# Altium PCB RheoBoard_V8.PcbDoc (part 2 of 3)
Units mm, origin at the board's own origin, x right, y up, seen from the top; angles counter-clockwise.
Board outline 57.53 x 83.82 mm, 2 copper layers (Top Layer, Bottom Layer); 104 components, 45 nets, 269 pads, 428 vias.
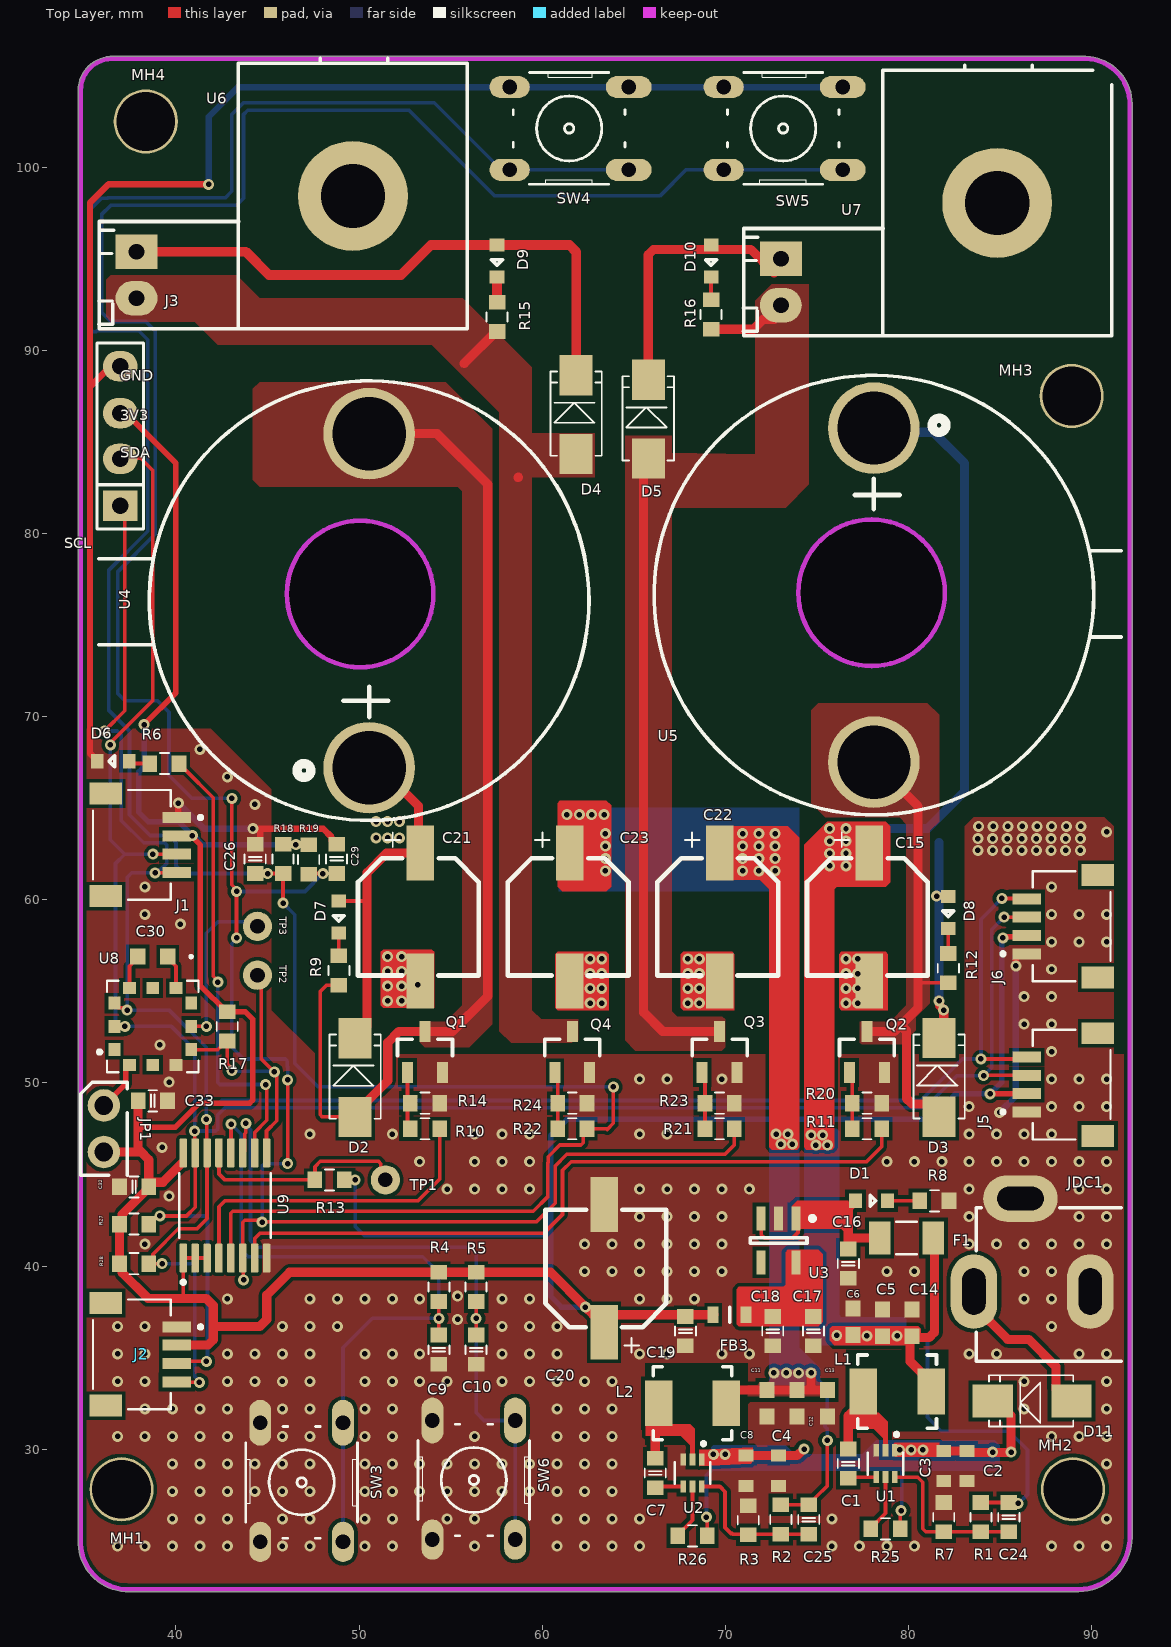
[diagram p0: Top Layer view]

## Via types
v1: diameter 0.6, hole 0.3, Top Layer to Bottom Layer, tented both sides, 428 vias

## Nets (pads, with @x,y where several pads share a name; then routed paths per layer and width w, separated by ;. In a path a pad name is that pad's centre, name@x,y a point inside that pad or via, vN(x,y) a via of type N, cw(c..) or ccw(c..) an arc to the next point about the centre after c; other vN are vias at no path point) (continued)
4V5: (continued)
  Bottom Layer w0.2: v1@77.844,36.195 80.909,36.195 81.026,36.078 81.026,31.75 81.788,30.988 85.471,30.988 86.487,29.972 86.487,27.533 86.005,27.051 v1(85.979,27.051) ; v1(81.534,60.198) 81.661,60.325 81.62,60.325 81.562,60.383 81.562,60.798 81.661,60.896
  Bottom Layer w0.5: v1@75.311,46.863 75.311,36.576 75.692,36.195 v1@77.844,36.195 ; v1(76.581,63.881) 81.026,63.881 83.058,65.913 83.058,83.82 81.355,85.523 78.334,85.523 U5.1@78.105,85.752 ; v1(81.661,54.483) 81.661,60.325 81.661,60.896 81.661,63.119
  other v1: 77.724,36.195 79.375,36.195 76.076,36.222 74.93,46.609 75.565,46.609 74.676,47.152 75.311,47.152 81.915,53.975 75.692,61.849 76.581,61.849 75.692,62.526 76.581,62.526 75.692,63.204 76.581,63.204 50.927,63.373 51.562,63.373 52.197,63.373 75.692,63.881 50.927,64.262 51.562,64.262 52.197,64.262
4V5A: C16.2 D1.1 F1.2 U3.1 U3.3 | length 8.6
  Top Layer w0.2: U3.3@71.948,42.602 71.948,41.717 72.136,41.529 73.66,41.529 73.96,41.829 73.96,42.414 73.998,42.452 U3.1@73.848,42.602
  Top Layer w0.5: C16.2@76.708,40.848 C16.2@76.858,40.998 ; C16.2@76.708,41.021 76.708,41.529 ; D1.1@77.103,43.561 76.708,43.166 76.708,41.529 ; F1.2@78.413,41.529 76.708,41.529
6V: C11.2 C12.2 C13.2 C22.1 C23.1 C25.2 D4.2 D5.2 D9.1 D10.1 L2.2 R2.2 U6.1 U7.1 | length 96.1
  Top Layer w0.2: R2.2@73.025,26.962 C25.2@74.333,26.962 ; C25.2@74.549,26.962 74.599,26.962 74.899,27.262 74.899,27.348 75.565,28.014 v1(75.565,30.48)
  Top Layer w0.5: D5.2@65.786,88.381 65.786,95.211 66.079,95.504 71.374,95.504 U7.1@72.644,94.234 ; C22.1@69.681,62.545 69.681,62.095 70.181,61.595 72.715,61.595 73.109,61.2 73.348,61.2 73.498,61.05 73.498,54.143 73.406,54.051 v1(73.406,47.198) v1@73.406,47.117 ; L2.2@70.049,32.512 L2.2@70.049,32.736 ; L2.2@70.549,33.312 70.049,32.812 L2.2@70.049,32.736 ; 74.676,33.312 v1(74.676,34.163) ; C13.2@75.565,33.236 C12.2@73.914,33.236 C11.2@72.263,33.236 70.549,33.236 L2.2@70.049,32.736
  Top Layer w0.53: U6.1@37.338,95.377 U6.1@37.846,95.377 43.815,95.377 45.085,94.107 52.289,94.107 53.926,95.744 D9.1@57.531,95.744 61.482,95.744 61.849,95.377 D4.2@61.849,88.635
  Bottom Layer w0.2: v1(74.676,34.163) 75.565,33.274 75.565,31.868 75.438,31.741 75.438,31.228 75.565,31.101 v1(75.565,30.48)
  Bottom Layer w0.5: v1@73.406,47.117 73.406,47.09 73.533,46.963 73.533,35.306 v1(74.676,34.163)
  other v1: 72.647,34.163 73.323,34.163 74,34.163 73.025,46.655 73.66,46.655 72.771,47.198 63.439,61.573 70.932,61.573 71.821,61.573 72.71,61.573 63.439,62.25 70.932,62.25 71.821,62.25 72.71,62.25 63.439,62.928 70.932,62.928 71.821,62.928 72.71,62.928 63.439,63.605 70.932,63.605 71.821,63.605 72.71,63.605 61.341,64.643 62.018,64.643 62.696,64.643 63.373,64.643
+12: D11.1 JDC1.1 | length 9
  Top Layer w0.5: JDC1.1@83.566,38.608 83.566,37.846 85.412,36 86.555,36 88.039,34.516 88.039,33.289 88.689,32.639 D11.1@88.889,32.639
D3V3: C19.2 C20.1 C32.2 C33.2 FB3.2 J1.2 J2.2 J3.3 J5.2 J6.2 JP1.2 R4.2 R5.2 R13.1 R17.1 R18.2 R19.2 R27.1 R28.1 U9.1 U9.2 U9.3 U9.16 | length 177.8
  Top Layer w0.2: 40.195,38.227 40.397,38.429 U9.1@40.397,40.437 U9.2@41.047,40.437 U9.3@41.697,40.437
  Top Layer w0.3: J3.3@37.084,86.614 37.211,86.614 39.989,83.836 39.989,71.287 v1(38.263,69.56) ; 37.935,47.707 38.052,47.59 39.97,47.59 41.275,48.895 44.023,48.895 44.199,49.071 44.199,53.464 43.777,53.886 R17.1@42.799,53.886 42.749,53.886 41.333,55.302 41.333,62.98 40.894,63.419 v1(40.894,63.5) 40.89,63.496 40.046,63.496 J1.2@40.042,63.492 ; R13.1@49.187,44.704 v1(49.784,44.704) ; 49.992,39.708 50.038,39.662 ; v1(84.455,49.403) 84.463,49.411 84.814,49.411 84.821,49.418 85.359,49.418 85.366,49.411 J5.2@86.45,49.411 ; v1(85.147,57.912) 85.204,57.969 86.372,57.969 J6.2@86.45,58.047
  Top Layer w0.5: JP1.2@36.068,46.228 38.099,46.228 ; C33.2@37.935,49.022 37.935,47.707 37.935,46.392 38.099,46.228 ; J2.2@40.036,35.687 41.744,35.687 42.037,35.98 42.037,36.703 ; U9.16@40.352,45.642 39.289,44.579 C32.2@38.519,44.579 ; FB3.2@69.357,37.34 67.818,37.34 62.776,37.34 v1(62.357,37.759) 60.454,39.662 R5.2@56.388,39.662 R4.2@54.356,39.662 50.038,39.662 46.203,39.662 44.958,38.417 44.958,37.084 44.577,36.703 42.037,36.703 ; 38.099,46.228 38.519,45.808 C32.2@38.519,44.579 ; C32.2@38.519,44.579 C32.2@38.519,44.323 38.519,44.273 37.069,42.823 37.069,42.441 R27.1@36.919,42.291 R28.1@36.919,40.132 37.069,39.982 37.069,39.639 38.481,38.227 40.195,38.227 41.656,38.227 42.037,37.846 42.037,36.703
  Bottom Layer w0.2: v1(49.784,44.704) 49.784,42.164 50.292,41.656 60.452,41.656
  Bottom Layer w0.3: v1(38.263,69.56) 38.263,67.27 37.973,66.98 37.973,64.771 38.482,64.262 40.132,64.262 v1(40.894,63.5) 40.975,63.5 41.46,63.015 v1(46.545,63.015) ; v1(62.357,37.759) 61.047,37.759 60.452,38.354 60.452,41.656 60.452,47.117 61.341,48.006 81.153,48.006 82.55,49.403 v1(84.455,49.403) 85.09,50.038 85.09,57.855 v1(85.147,57.912)